# Altium PCB main.PcbDoc
Units mil, origin at the board's own origin, x right, y up, seen from the top; angles counter-clockwise.
Board outline 1775 x 1364.94 mil, 2 copper layers (Top Layer, Bottom Layer); 17 components, 12 nets, 57 pads, 0 vias.
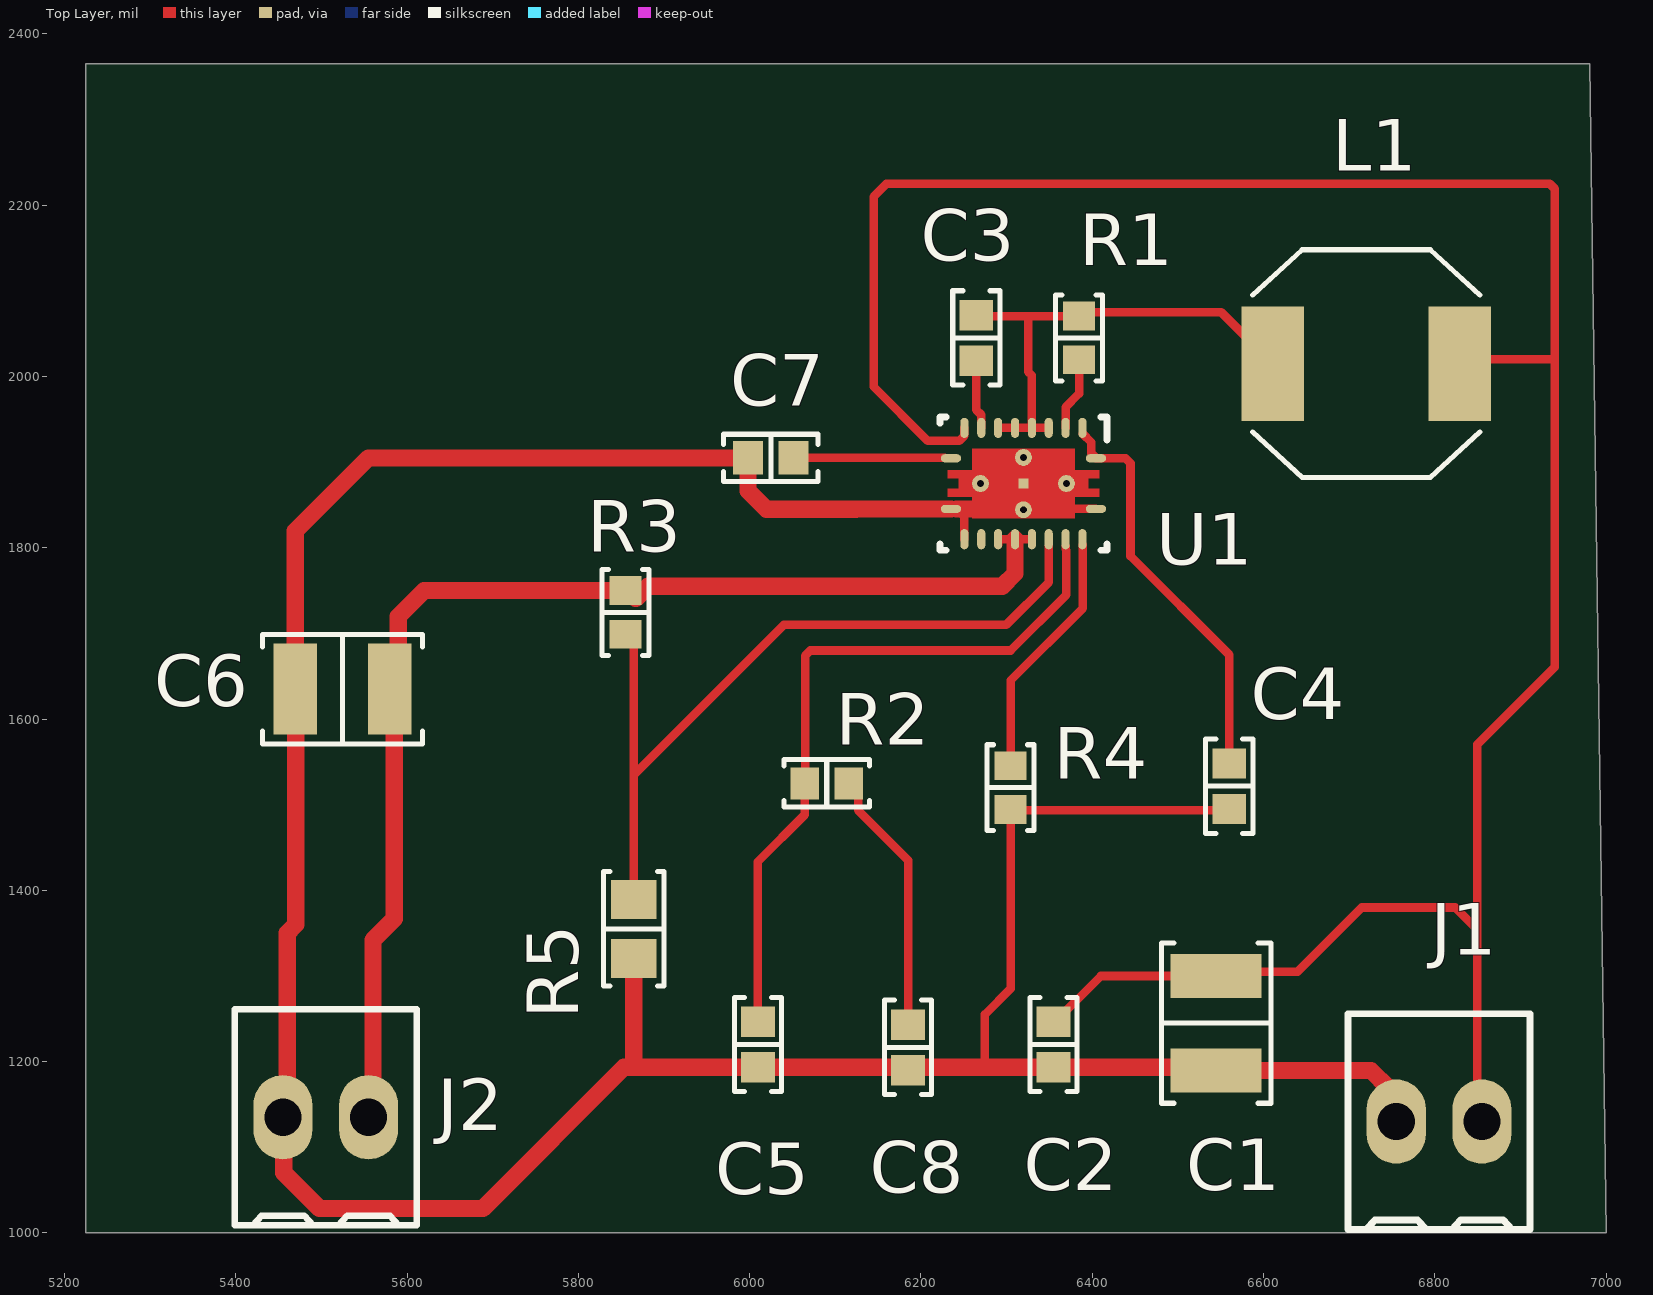
[diagram p0: Top Layer view]
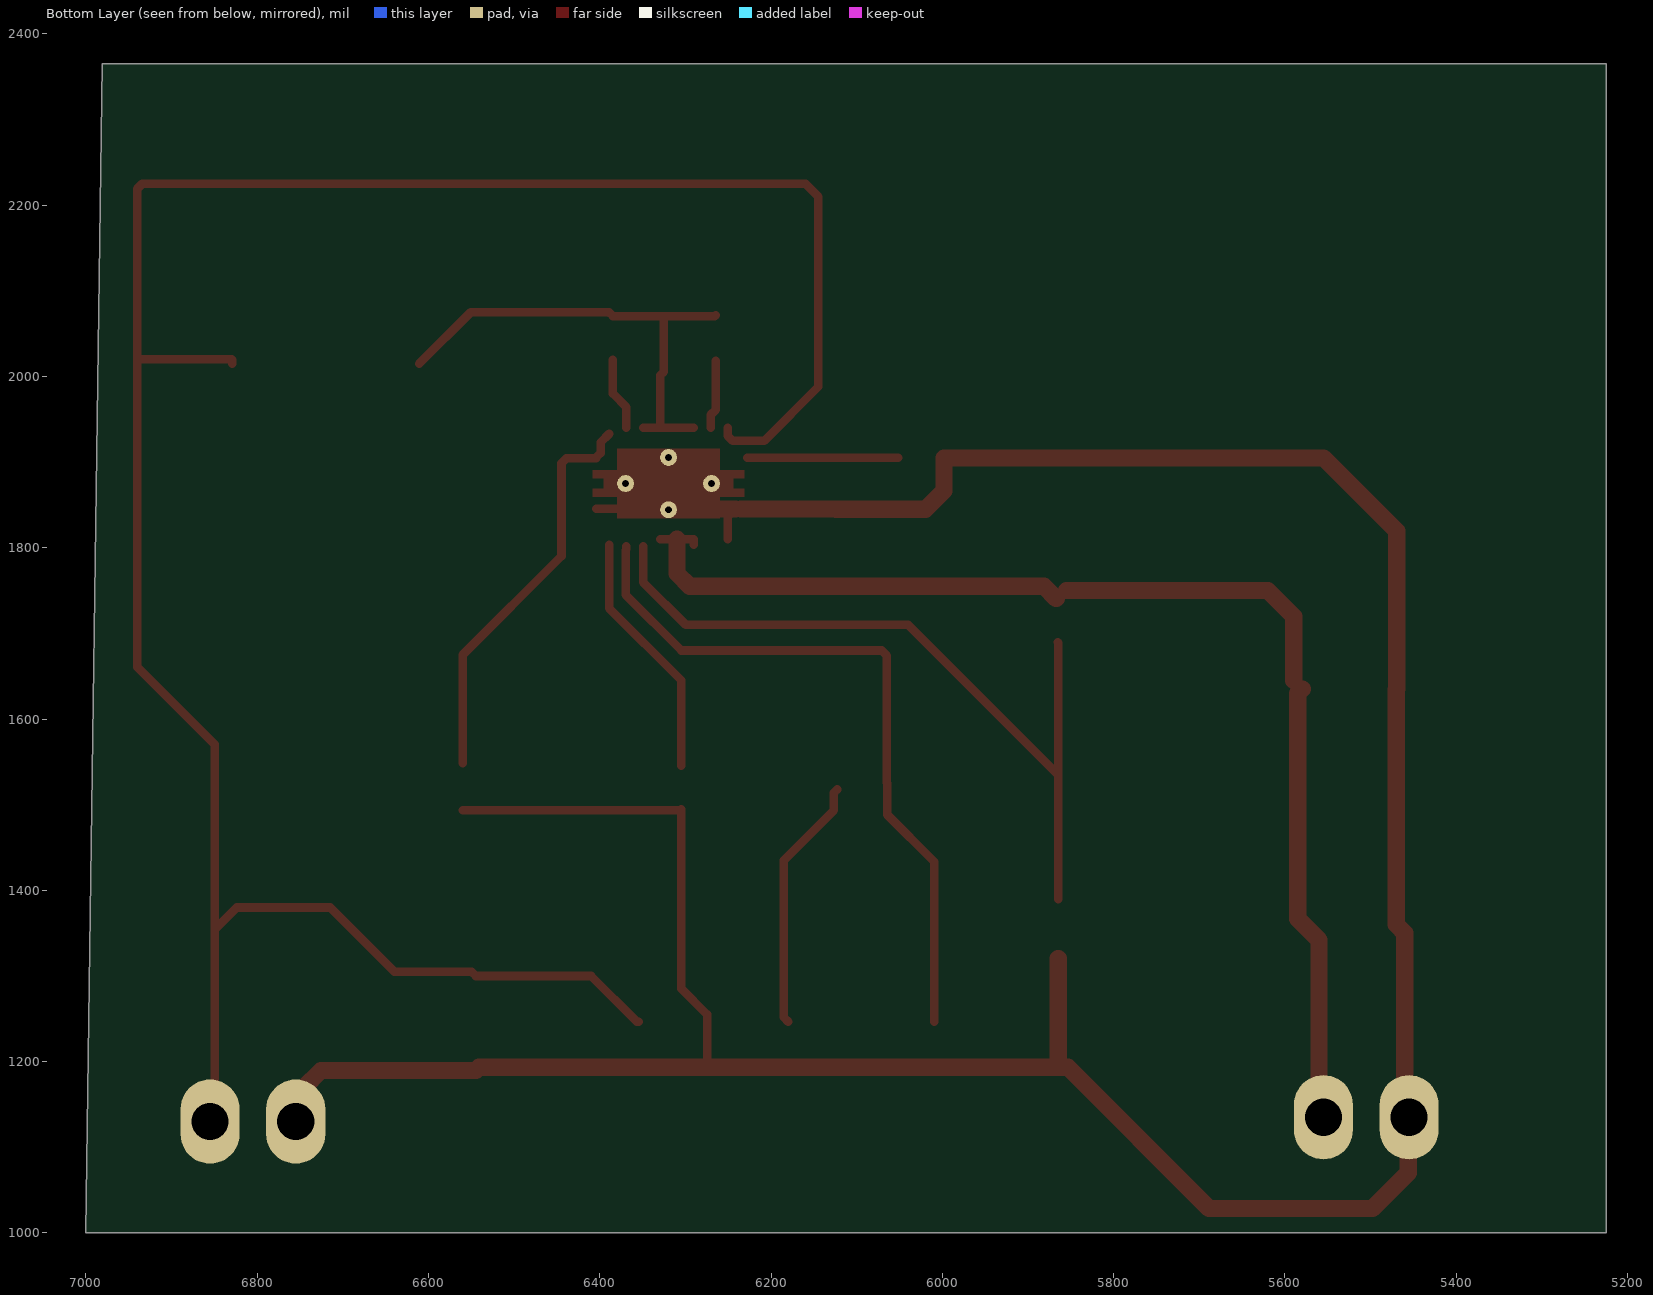
[diagram p1: Bottom Layer view, seen from below]
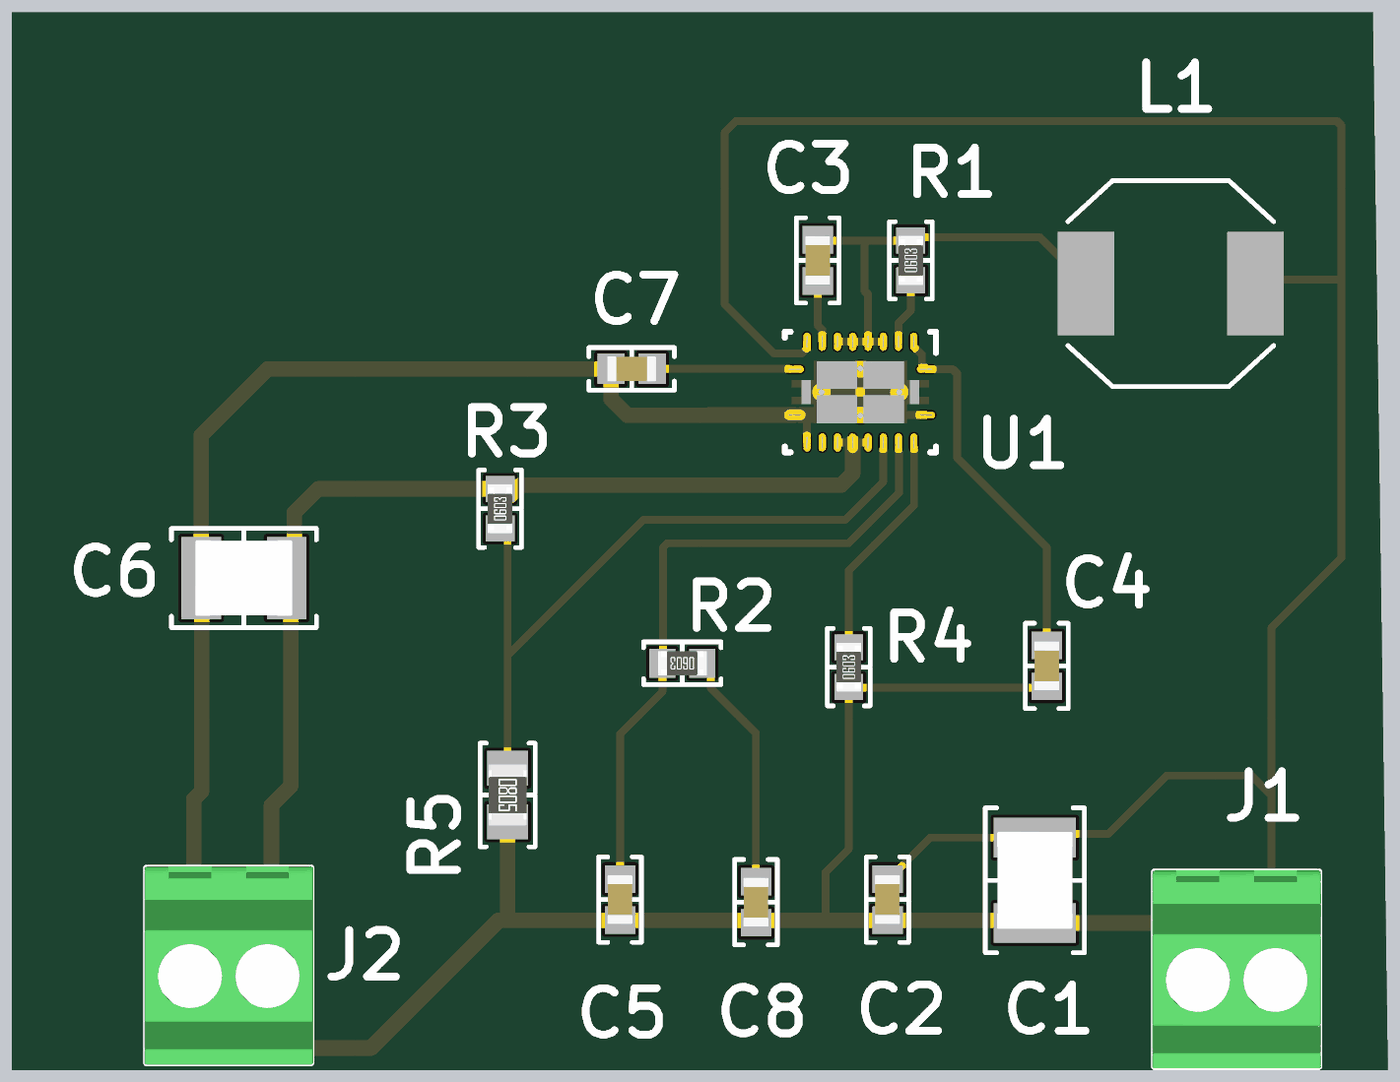
[diagram p2: 3D render of the assembled board from above, using the file's embedded part models]

## Layer stack, top to bottom
Top Solder: solder mask 0.4, Solder Resist, Dk 3.5
Top Layer: signal copper 1.4
Dielectric 1: dielectric 12.6, FR-4, Dk 4.8
Bottom Layer: signal copper 1.4
Bottom Solder: solder mask 0.4, Solder Resist, Dk 3.5

## Board outline
5225,1000 7000,1000 6980.68,2364.94 5225,2364.94

## Design rules (kind name [scope] priority, off if disabled: settings)
Clearance [All] p1: gap=7 ignorepadtopadclearanceinfootprint=TRUE except(0: Arc-Hole Track-Hole SMDPad-Hole THPad-Hole Via-Hole Fill-Hole Poly-Hole Region-Hole Text-Hole)
PolygonConnect [All] p1: connectstyle=Relief reliefconductorwidth=10 reliefentries=4 polygonreliefangle="90 Angle" airgapwidth=10
RoutingVias [All] p1: holewidth=28 width=50 viastyle="Through Hole" minholewidth=28 minwidth=50 maxholewidth=28 maxwidth=50
SolderMaskExpansion [All] p1: expansion=4 istentingtop=FALSE
Width [All] p1: maxlimit=20 minlimit=10 preferedwidth=10 minimp=50.000000 maximp=50.000000 favimp=50.000000
30 further rules are at their usual default settings.

## Components (designator, comment, footprint, x,y, rotation, side; value= is the part's Value field where it differs from the comment)
C1 "10µF" "CAP 1210_3225 - 2.8MM" 6544.69,1244.85 r270 top
C2 "100nF" "CAP 0603_1608" 6354.69,1219.96 r270 top
C3 "0.1µF" "CAP 0603_1608" 6264.69,2044.96 r90 top
C4 "1µF" "CAP 0603_1608" 6560,1521.57 r90 top
C5 "22pF" "CAP 0603_1608" 6009.69,1219.96 r90 top
C6 "22µF" "CAP 1210_3225 - 2.8MM" 5524.57,1634.96 r0 top
C7 "8.2nF" "CAP 0603_1608" 6024.69,1904.96 r0 top
C8 "Ccomp=Value" "CAP 0603_1608" 6185,1216.57 r90 top value=470pF
J1 "282834-2" "TE 282834-2" 6805,1130 r180 top
J2 "282834-2" "TE 282834-2" 5505,1135 r180 top
L1 "SPM6530T-2R2M" IND_SPM6530_TDK 6720,2015 r0 top
R1 "267 kOhms" "RES 0603_1608" 6384.69,2044.96 r90 top
R2 "36.5 kOhms" "RES 0603_1608" 6090,1525 r180 top
R3 "865 kOhms" "RES 0603_1608" 5855,1724.41 r90 top
R4 "105 kOhms" "RES 0603_1608" 6304.69,1519.96 r90 top
R5 "92 kOhms" "RES 0805_2012" 5864.69,1354.96 r270 top
U1 "TPS61088RHLR" RHL0020A 6319.69,1874.97 r270 top value=Value

## Footprints (in the part's own frame and the unit in brackets; to place one, negate y for a bottom-side part, rotate by r counter-clockwise, add the part's x,y. Pads: shape width x height; smd on the part's side, far side on the other; paste and mask are expansions set on the pad)
"CAP 0603_1608" [mm] "Chip Capacitor, 2-Leads, Body 1.60x0.80mm, IPC Medium Density"
  rect 0.9x1 smd: 1(-0.675,0) 2(0.675,0)
  silkscreen extent -1.4,-0.7 1.4,0.7, body extent -0.8,-0.41 0.8,0.41, height 0.82
"CAP 1210_3225 - 2.8MM" [mm] "Chip Capacitor, 2-Leads, Body 3.20x2.50mm, IPC Medium Density"
  rect 1.3x2.7 smd: 1(-1.4,0) 2(1.4,0)
  silkscreen extent -2.37,-1.63 2.37,1.63, body extent -1.6,-1.25 1.6,1.25, height 2.8
IND_SPM6530_TDK [mm]
  rect 1.85x3.4 smd paste+0 mask+0: 1(-2.775,0) 2(2.775,0)
  silkscreen extent -3.37,-3.38 3.37,3.38, body extent 0,0 0.25,0.25, height 0.25
"RES 0603_1608" [mm] "Chip Resistor, 2-Leads, Body 1.60x0.80mm, IPC Medium Density"
  rect 0.85x0.95 smd: 1(-0.65,0) 2(0.65,0)
  silkscreen extent -1.27,-0.7 1.27,0.7, body extent -0.8,-0.4 0.8,0.4, height 0.45
"RES 0805_2012" [mm] "Chip Resistor, 2-Leads, Body 2.00x1.25mm, IPC Medium Density"
  rect 1.15x1.35 smd: 1(-0.875,0) 2(0.875,0)
  silkscreen extent -1.7,-0.9 1.7,0.9, body extent -1,-0.62 1,0.63, height 0.6
RHL0020A [mm]
  oval 0.24x0.6 smd paste-0.102 mask+0.051: 1(-0.75,2.15) 10(-0.75,-2.15) 11(0.75,-2.15) 20(0.75,2.15)
  oval 0.6x0.24 smd paste-0.102 mask+0.051: 2(-1.65,1.75) 3(-1.65,1.25) 4(-1.65,0.75) 5(-1.65,0.25) 6(-1.65,-0.25) 7(-1.65,-0.75) 8(-1.65,-1.25) 9(-1.65,-1.75) 12(1.65,-1.75) 13(1.65,-1.25) 14(1.65,-0.75) 15(1.65,-0.25) 16(1.65,0.25) 17(1.65,0.75) 18(1.65,1.25) 19(1.65,1.75)
  rect 0.3x0.3 smd paste-0.137 mask+0: 21(0,0)
  round 0.5 hole 0.203 mask+0.051: V(-0.775,0) V(0,1.275) V(0,-1.275) V(0.775,0)
  Top Layer region: 0.39,2.25 0.16,2.25 0.16,1.925 -0.16,1.925 -0.16,2.25 -0.39,2.25 -0.39,1.525 -1.025,1.525 -1.025,-1.525 -0.39,-1.525 -0.39,-2.25 -0.16,-2.25 -0.16,-1.925 0.16,-1.925 0.16,-2.25 0.39,-2.25 0.39,-1.525 1.025,-1.525 1.025,1.525 0.39,1.525
  silkscreen extent -1.98,-2.47 1.98,2.47, body extent 0,0 0.25,0.25, height 0.25
"TE 282834-2" [mm]
  oval 1.75x2.5 hole 1.1: 1(-1.27,0) 2(1.27,0)
  silkscreen extent -2.7,-3.2 2.7,3.2, body extent -2.77,-3.25 2.77,3.25, height 10

## Part data
C1: library part GCJ32EC71H106KA01L, "CAP CER 10UF 50V X7S 1210", Device Package="1210 (3225 Metric)", Manufacturer="Murata Electronics", Operating Temperature="-55°C ~ 125°C", Ratings=AEC-Q200, Supplier Part Number 1=490-14418-1-ND, Temperature Coefficient=X7S, Tolerance=±10%, Voltage - Rated=50V, Applications="Automotive, Boardflex Sensitive", Capacitance=10µF, ComponentLink1Description=Datasheet, ComponentLink1URL=https://search.murata.co.jp/Ceramy/image/img/A01X/G101/ENG/GCJ32EC71H106KA01-01.pdf, ComponentLink2Description="DigiKey Link", ComponentLink2URL=http://digikey.com/product-detail/en/murata-electronics/GCJ32EC71H106KA01L/490-14418-1-ND/6606879, Features="Soft Termination", LastUpdated="02.09.2020 1:10:53", Lifecycle Status=Active, Minimum Order=1, Mounting Type="Surface Mount, MLCC", Package / Case="1210 (3225 Metric)", Packaging=TapeAndReel, Part Number=GCJ32EC71H106KA01L, Part Status=Active, PartId=23622, Price=0.53, Series=GCJ, Size / Dimension="0.126\" L x 0.098\" W (3.20mm x 2.50mm)", Supplier 1=DigiKey, Thickness (Max)="0.110\" (2.80mm)"
C2: library part 06033A220KAT2A, "CAP CER 22PF 25V C0G/NP0 0603", Capacitance=22pF, Device Package="0603 (1608 Metric)", Manufacturer="AVX Corporation", Operating Temperature="-55°C ~ 125°C", Supplier Part Number 1=478-11803-1-ND, Temperature Coefficient="C0G, NP0", Tolerance=±10%, Voltage - Rated=25V, Applications="General Purpose", ComponentLink1Description=Datasheet, ComponentLink1URL=http://datasheets.avx.com/C0GNP0-Dielectric.pdf, ComponentLink2Description="DigiKey Link", ComponentLink2URL=http://digikey.com/product-detail/en/avx-corporation/06033A220KAT2A/478-11803-1-ND/8573439, LastUpdated="02.09.2020 1:03:34", Lifecycle Status=Active, Minimum Order=1, Mounting Type="Surface Mount, MLCC", Package / Case="0603 (1608 Metric)", Packaging=TapeAndReel, Part Number=06033A220KAT2A, Part Status=Active, PartId=3017, Price=0.04, Series=-, Size / Dimension="0.063\" L x 0.032\" W (1.60mm x 0.81mm)", Supplier 1=DigiKey, Thickness (Max)="0.035\" (0.90mm)"
C3: library part 0603YC104JAT4A, "CAP CER 0.1UF 16V X7R 0603", Device Package="0603 (1608 Metric)", Manufacturer="AVX Corporation", Operating Temperature="-55°C ~ 125°C", Supplier Part Number 1=478-7621-1-ND, Temperature Coefficient=X7R, Tolerance=±5%, Voltage - Rated=16V, Applications="General Purpose", Capacitance=0.1µF, ComponentLink1Description=Datasheet, ComponentLink1URL=http://datasheets.avx.com/X7RDielectric.pdf, ComponentLink2Description="DigiKey Link", ComponentLink2URL=http://digikey.com/product-detail/en/avx-corporation/0603YC104JAT4A/478-7621-1-ND/7536239, LastUpdated="02.09.2020 1:03:19", Lifecycle Status=Active, Minimum Order=1, Mounting Type="Surface Mount, MLCC", Package / Case="0603 (1608 Metric)", Packaging=TapeAndReel, Part Number=0603YC104JAT4A, Part Status=Active, PartId=11638, Price=0.03, Series=-, Size / Dimension="0.063\" L x 0.032\" W (1.60mm x 0.81mm)", Supplier 1=DigiKey, Thickness (Max)="0.035\" (0.90mm)"
C4: library part C0603C105K4PACTU, "CAP CER 1UF 16V X5R 0603", Device Package="0603 (1608 Metric)", Manufacturer=KEMET, Operating Temperature="-55°C ~ 85°C", Supplier Part Number 1=399-5090-1-ND, Temperature Coefficient=X5R, Tolerance=±10%, Voltage - Rated=16V, Applications="General Purpose", Capacitance=1µF, ComponentLink1Description=Datasheet, ComponentLink1URL=https://api.kemet.com/component-edge/download/datasheet/C0603C105K4PACTU.pdf, ComponentLink2Description="DigiKey Link", ComponentLink2URL=http://digikey.com/product-detail/en/kemet/C0603C105K4PACTU/399-5090-1-ND/1465624, LastUpdated="02.09.2020 1:03:33", Lifecycle Status=Active, Minimum Order=1, Mounting Type="Surface Mount, MLCC", Package / Case="0603 (1608 Metric)", Packaging=TapeAndReel, Part Number=C0603C105K4PACTU, Part Status=Active, PartId=3768, Price=0.02, Series="SMD Comm X5R", Size / Dimension="0.063\" L x 0.031\" W (1.60mm x 0.80mm)", Supplier 1=DigiKey, Thickness (Max)="0.035\" (0.90mm)"
C5: library part 06033A220KAT2A, "CAP CER 22PF 25V C0G/NP0 0603", Device Package="0603 (1608 Metric)", Manufacturer="AVX Corporation", Operating Temperature="-55°C ~ 125°C", Supplier Part Number 1=478-11803-1-ND, Temperature Coefficient="C0G, NP0", Tolerance=±10%, Voltage - Rated=25V, Applications="General Purpose", Capacitance=22pF, ComponentLink1Description=Datasheet, ComponentLink1URL=http://datasheets.avx.com/C0GNP0-Dielectric.pdf, ComponentLink2Description="DigiKey Link", ComponentLink2URL=http://digikey.com/product-detail/en/avx-corporation/06033A220KAT2A/478-11803-1-ND/8573439, LastUpdated="02.09.2020 1:03:34", Lifecycle Status=Active, Minimum Order=1, Mounting Type="Surface Mount, MLCC", Package / Case="0603 (1608 Metric)", Packaging=TapeAndReel, Part Number=06033A220KAT2A, Part Status=Active, PartId=3017, Price=0.04, Series=-, Size / Dimension="0.063\" L x 0.032\" W (1.60mm x 0.81mm)", Supplier 1=DigiKey, Thickness (Max)="0.035\" (0.90mm)"
C6: library part GRM32ER71E226ME15K, "CAP CER 22UF 25V X7R 1210", Device Package="1210 (3225 Metric)", Manufacturer="Murata Electronics", Operating Temperature="-55°C ~ 125°C", Supplier Part Number 1=490-14682-1-ND, Temperature Coefficient=X7R, Tolerance=±20%, Voltage - Rated=25V, Applications="General Purpose", Capacitance=22µF, ComponentLink1Description=Datasheet, ComponentLink1URL=https://search.murata.co.jp/Ceramy/image/img/A01X/G101/ENG/GRM32ER71E226ME15-01.pdf, ComponentLink2Description="DigiKey Link", ComponentLink2URL=http://digikey.com/product-detail/en/murata-electronics/GRM32ER71E226ME15K/490-14682-1-ND/6606288, LastUpdated="02.09.2020 1:10:50", Lifecycle Status=Active, Minimum Order=1, Mounting Type="Surface Mount, MLCC", Package / Case="1210 (3225 Metric)", Packaging=TapeAndReel, Part Number=GRM32ER71E226ME15K, Part Status=Active, PartId=24019, Price=0.35, Series=GRM, Size / Dimension="0.126\" L x 0.098\" W (3.20mm x 2.50mm)", Supplier 1=DigiKey, Thickness (Max)="0.106\" (2.70mm)"
C7: library part C0603C105K4PACTU, "CAP CER 1UF 16V X5R 0603", Capacitance=1µF, Device Package="0603 (1608 Metric)", Manufacturer=KEMET, Operating Temperature="-55°C ~ 85°C", Supplier Part Number 1=399-5090-1-ND, Temperature Coefficient=X5R, Tolerance=±10%, Voltage - Rated=16V, Applications="General Purpose", ComponentLink1Description=Datasheet, ComponentLink1URL=https://api.kemet.com/component-edge/download/datasheet/C0603C105K4PACTU.pdf, ComponentLink2Description="DigiKey Link", ComponentLink2URL=http://digikey.com/product-detail/en/kemet/C0603C105K4PACTU/399-5090-1-ND/1465624, LastUpdated="02.09.2020 1:03:33", Lifecycle Status=Active, Minimum Order=1, Mounting Type="Surface Mount, MLCC", Package / Case="0603 (1608 Metric)", Packaging=TapeAndReel, Part Number=C0603C105K4PACTU, Part Status=Active, PartId=3768, Price=0.02, Series="SMD Comm X5R", Size / Dimension="0.063\" L x 0.031\" W (1.60mm x 0.80mm)", Supplier 1=DigiKey, Thickness (Max)="0.035\" (0.90mm)"
C8: library part 885012006027, "CAP CER 470PF 16V C0G/NP0 0603", Capacitance=470pF, Device Package="0603 (1608 Metric)", Manufacturer="Würth Elektronik", Operating Temperature="-55°C ~ 125°C", Supplier Part Number 1=732-7770-1-ND, Temperature Coefficient="C0G, NP0", Tolerance=±5%, Voltage - Rated=16V, Applications="General Purpose", ComponentLink1Description=Datasheet, ComponentLink1URL=https://katalog.we-online.de/pbs/datasheet/885012006027.pdf, ComponentLink2Description="DigiKey Link", ComponentLink2URL=http://digikey.com/product-detail/en/w-rth-elektronik/885012006027/732-7770-1-ND/5454397, LastUpdated="02.09.2020 1:03:24", Lifecycle Status=Active, Minimum Order=1, Mounting Type="Surface Mount, MLCC", Package / Case="0603 (1608 Metric)", Packaging=TapeAndReel, Part Number=885012006027, Part Status=Active, PartId=8947, Price=0.05, Series=WCAP-CSGP, Size / Dimension="0.063\" L x 0.031\" W (1.60mm x 0.80mm)", Supplier 1=DigiKey, Thickness (Max)="0.034\" (0.87mm)"
J1 J2: "TERM BLK 2P SIDE ENT 2.54MM PCB", Color=Green, Current=10A, Manufacturer="TE Connectivity AMP Connectors", Supplier Part Number 1=A98333-ND, Voltage=150V, ComponentLink1Description=Datasheet, ComponentLink1URL=https://www.te.com/commerce/DocumentDelivery/DDEController?Action=srchrtrv&DocNm=282834&DocType=Customer+Drawing&DocLang=English, ComponentLink2Description="DigiKey Link", ComponentLink2URL=http://digikey.com/product-detail/en/te-connectivity-amp-connectors/282834-2/A98333-ND/1150135, LastUpdated="15.01.2020 4:15:38", Lifecycle Status=Active, Mating Orientation="Horizontal with Board", Minimum Order=1, Mounting Type="Through Hole", Number of Levels=1, Packaging=Bulk, Part Number=282834-2, Part Status=Active, Pitch="0.100\" (2.54mm)", Positions Per Level=2, Price=0.88, Series=Buchanan, Supplier 1=DigiKey, Wire Gauge="16-30 AWG", Wire Termination="Screw - Rising Cage Clamp"
L1: "No Description Available", Built_By=EMA_UL_Team, Copyright="Copyright (C) 2018 Accelerated Designs. All rights reserved", Manufacturer_Part_Number=SPM6530T-2R2M, SourceLibrary=TDK_2015_05_22, Vendor=TDK
R1: library part RC0603FR-07267KL, "RES SMD 267K OHM 1% 1/10W 0603", Device Package="0603 (1608 Metric)", Manufacturer=Yageo, Operating Temperature="-55°C ~ 155°C", Power (Watts)="0.1W, 1/10W", Supplier Device Package=0603, Supplier Part Number 1=311-267KHRCT-ND, Temperature Coefficient=±100ppm/°C, Tolerance=±1%, ComponentLink1Description=Datasheet, ComponentLink1URL=https://www.yageo.com/upload/media/product/productsearch/datasheet/rchip/PYu-RC_Group_51_RoHS_L_10.pdf, ComponentLink2Description="DigiKey Link", ComponentLink2URL=http://digikey.com/product-detail/en/yageo/RC0603FR-07267KL/311-267KHRCT-ND/730045, Composition="Thick Film", Features="Moisture Resistant", Height - Seated (Max)="0.022\" (0.55mm)", LastUpdated="02.09.2020 1:10:19", Lifecycle Status=Active, Minimum Order=1, Number of Terminations=2, Package / Case="0603 (1608 Metric)", Packaging=CutTape, Part Number=RC0603FR-07267KL, Part Status=Active, PartId=7613, Price=0.10, Resistance="267 kOhms", Series=RC, Size / Dimension="0.063\" L x 0.031\" W (1.60mm x 0.80mm)", Supplier 1=DigiKey
R2: library part CR0603-FX-3652ELF, "RES SMD 36.5K OHM 1% 1/10W 0603", Device Package="0603 (1608 Metric)", Manufacturer="Bourns Inc.", Operating Temperature="-55°C ~ 155°C", Power (Watts)="0.1W, 1/10W", Supplier Device Package=0603, Supplier Part Number 1=CR0603-FX-3652ELFCT-ND, Temperature Coefficient=±100ppm/°C, Tolerance=±1%, ComponentLink1Description=Datasheet, ComponentLink1URL=https://www.bourns.com/docs/Product-Datasheets/CHPREZTR.pdf, ComponentLink2Description="DigiKey Link", ComponentLink2URL=http://digikey.com/product-detail/en/bourns-inc/CR0603-FX-3652ELF/CR0603-FX-3652ELFCT-ND/4247786, Composition="Thick Film", Features="Moisture Resistant", Height - Seated (Max)="0.022\" (0.55mm)", LastUpdated="02.09.2020 1:10:18", Lifecycle Status=Active, Minimum Order=1, Number of Terminations=2, Package / Case="0603 (1608 Metric)", Packaging=TapeAndReel, Part Number=CR0603-FX-3652ELF, Part Status=Active, PartId=8146, Price=0.01, Resistance="36.5 kOhms", Series=CR0603, Size / Dimension="0.063\" L x 0.031\" W (1.60mm x 0.80mm)", Supplier 1=DigiKey
R3: library part RC0603FR-07267KL, "RES SMD 267K OHM 1% 1/10W 0603", Device Package="0603 (1608 Metric)", Manufacturer=Yageo, Operating Temperature="-55°C ~ 155°C", Power (Watts)="0.1W, 1/10W", Resistance="267 kOhms", Supplier Device Package=0603, Supplier Part Number 1=311-267KHRCT-ND, Temperature Coefficient=±100ppm/°C, Tolerance=±1%, ComponentLink1Description=Datasheet, ComponentLink1URL=https://www.yageo.com/upload/media/product/productsearch/datasheet/rchip/PYu-RC_Group_51_RoHS_L_10.pdf, ComponentLink2Description="DigiKey Link", ComponentLink2URL=http://digikey.com/product-detail/en/yageo/RC0603FR-07267KL/311-267KHRCT-ND/730045, Composition="Thick Film", Features="Moisture Resistant", Height - Seated (Max)="0.022\" (0.55mm)", LastUpdated="02.09.2020 1:10:19", Lifecycle Status=Active, Minimum Order=1, Number of Terminations=2, Package / Case="0603 (1608 Metric)", Packaging=CutTape, Part Number=RC0603FR-07267KL, Part Status=Active, PartId=7613, Price=0.10, Series=RC, Size / Dimension="0.063\" L x 0.031\" W (1.60mm x 0.80mm)", Supplier 1=DigiKey
R4: library part RC0603FR-07105KL, "RES SMD 105K OHM 1% 1/10W 0603", Device Package="0603 (1608 Metric)", Manufacturer=Yageo, Operating Temperature="-55°C ~ 155°C", Power (Watts)="0.1W, 1/10W", Supplier Device Package=0603, Supplier Part Number 1=311-105KHRCT-ND, Temperature Coefficient=±100ppm/°C, Tolerance=±1%, ComponentLink1Description=Datasheet, ComponentLink1URL=https://www.yageo.com/upload/media/product/productsearch/datasheet/rchip/PYu-RC_Group_51_RoHS_L_10.pdf, ComponentLink2Description="DigiKey Link", ComponentLink2URL=http://digikey.com/product-detail/en/yageo/RC0603FR-07105KL/311-105KHRCT-ND/729840, Composition="Thick Film", Features="Moisture Resistant", Height - Seated (Max)="0.022\" (0.55mm)", LastUpdated="02.09.2020 1:10:19", Lifecycle Status=Active, Minimum Order=1, Number of Terminations=2, Package / Case="0603 (1608 Metric)", Packaging=CutTape, Part Number=RC0603FR-07105KL, Part Status=Active, PartId=7511, Price=0.10, Resistance="105 kOhms", Series=RC, Size / Dimension="0.063\" L x 0.031\" W (1.60mm x 0.80mm)", Supplier 1=DigiKey
R5: library part RN73C2A392KBTDF, "RES SMD 392K OHM 0.1% 1/10W 0805", Device Package="0805 (2012 Metric)", Manufacturer="TE Connectivity Passive Product", Operating Temperature="-55°C ~ 155°C", Power (Watts)="0.1W, 1/10W", Resistance="392 kOhms", Supplier Device Package=0805, Supplier Part Number 1=A103425CT-ND, Temperature Coefficient=±10ppm/°C, Tolerance=±0.1%, ComponentLink1Description=Datasheet, ComponentLink1URL=https://www.te.com/commerce/DocumentDelivery/DDEController?Action=srchrtrv&DocNm=1773270&DocType=DS&DocLang=English, ComponentLink2Description="DigiKey Link", ComponentLink2URL=http://digikey.com/product-detail/en/te-connectivity-passive-product/RN73C2A392KBTDF/A103425CT-ND/2730640, Composition="Thin Film", Height - Seated (Max)="0.026\" (0.65mm)", LastUpdated="02.09.2020 1:14:40", Lifecycle Status=Active, Minimum Order=1, Number of Terminations=2, Package / Case="0805 (2012 Metric)", Packaging=TapeAndReel, Part Number=RN73C2A392KBTDF, Part Status=Active, PartId=46853, Price=0.37, Series="RN73, Holsworthy", Size / Dimension="0.079\" L x 0.049\" W (2.00mm x 1.25mm)", Supplier 1=DigiKey
U1: "No Description Available", Alternate_PartNumber=TPS61088RHLT, Manufacturer="Texas Instruments", CompType=IC, Copyright="Copyright (C) 2018 Accelerated Designs. All rights reserved", MountType=SMT, PackageReference=RHL0020A, PartNumber=TPS61088RHLR, PIN_COUNT=21, RefDes=RefDes, RoHS=Y, Type=DEV

## Nets (pads, with @x,y where several pads share a name; then routed paths per layer and width w, separated by ;. In a path a pad name is that pad's centre, name@x,y a point inside that pad or via, vN(x,y) a via of type N, cw(c..) or ccw(c..) an arc to the next point about the centre after c; other vN are vias at no path point)
+7.4V: C1.1 C2.1 J1.1 L1.2 U1.9 | length 2972.3
  Top Layer w10: U1.9 6250.79,1930.86 6244.93,1925 6207.82,1925 6144.69,1988.14 6144.69,2209.96 6159.69,2224.96 6934.14,2224.96 6940,2219.11 6940,2020 ; C2.1 6356.65,1246.54 6410.08,1299.96 C1.1 6549.69,1304.96 6639.69,1304.96 6714.69,1379.96 6823.83,1379.96 6849.69,1354.11 ; L1.2 6829.25,2019.25 6830,2020 6940,2020 ; J1.1@6849.69,1130 6849.69,1354.11 ; 6849.69,1354.11 6849.69,1570.36 6940,1660.67 6940,2020
+12v: C6.2 J2.1 R3.2 U1.14 U1.15 U1.16 | length 1430
  Top Layer w10: C6.2 C6.2@5589.72,1645 ; U1.14@6290.16,1803.47 U1.14 ; U1.14@6290.43,1810.01 U1.15 U1.16
  Top Layer w20: J2.1@5560,1125 5560,1228 5560,1341.75 5585,1366.75 5585,1629.65 C6.2 ; C6.2@5589.72,1645 5589.72,1719.72 5620,1750 R3.2 ; R3.2@5866.97,1740.59 5881.38,1755 6295,1755 6309.84,1769.84 U1.15
GND: C1.2 C2.2 C4.1 C5.1 C6.1 C7.1 C8.1 J1.2 J2.2 R4.1 R5.2 U1.11 U1.12 U1.20 U1.21 | length 3908.5
  Top Layer w10: 6123.86,1844.96 6124.33,1845.44 ; U1.11 6241.58,1845.44 6250.79,1836.23 U1.12 ; 6274.69,1193.39 6274.69,1254.96 6304.69,1284.96 R4.1 6305.67,1493.39 C4.1@6560,1493.39 ; 6278.74,1845.44 6279.21,1844.96 6279.69,1844.96 ; U1.21 6320.59,1874.06 6339.9,1874.06 6368.53,1845.44 U1.20 ; C1.2@6541.02,1193.39 C1.2
  Top Layer w20: J2.2 5456.06,1133.94 5456.06,1070.15 5497.92,1028.28 5688.28,1028.28 5853.39,1193.39 5864.69,1193.39 ; J2.2@5460,1135 5460,1200 5460,1350 5470,1360 5470,1634.41 C6.1 5469.45,1819.45 5554.96,1904.96 C7.1 5998.11,1866.54 6019.69,1844.96 6123.86,1844.96 ; R5.2 5864.69,1193.39 ; 6124.33,1845.44 U1.11 ; U1.11@6241.58,1845.44 6250.79,1845.44 6278.74,1845.44 ; C1.2@6541.02,1193.39 C2.2 6274.69,1193.39 6185,1193.39 C5.1 5864.69,1193.39 ; C1.2 6725.39,1189.73 6745.64,1169.47 6745.64,1139.36 J1.2
NetC3_1: C3.1 U1.8 | length 80.9
  Top Layer w10: C3.1 6264.69,1961.01 6270.47,1955.22 U1.8
NetC3_2: C3.2 L1.1 R1.2 U1.4 U1.5 U1.6 U1.7 | length 564.4
  Top Layer w10: C3.2 6265.67,2070.55 6325.18,2070.55 ; U1.7@6290.43,1939.93 U1.6 U1.5 ; U1.4 U1.5 ; L1.1 6550.75,2075 6389.13,2075 R1.2 6325.18,2070.55 ; 6325.18,2070.55 6325.18,2005.46 6329.53,2001.11 U1.5
NetC4_2: C4.2 U1.1 U1.2 | length 475.2
  Top Layer w10: U1.2@6388.86,1933.12 6399.1,1922.87 6399.1,1910.55 U1.1@6404.33,1905.32 ; U1.1 6438.83,1904.49 6444.69,1898.63 6444.69,1790.32 6560,1675 C4.2
NetC5_2: C5.2 R2.2 U1.18 | length 841.6
  Top Layer w10: C5.2 6009.69,1433.59 6064.41,1488.31 R2.2 6065,1525.59 6065,1674.14 6070.86,1680 6304.72,1680 6369.69,1744.96 6369.69,1797.27 6368.9,1798.06 U1.18@6368.9,1801.67
NetC7_2: C7.2 U1.10 | length 176.6
  Top Layer w10: C7.2 U1.10@6227.86,1904.96
NetC8_2: C8.2 R2.1 | length 299
  Top Layer w10: R2.1@6122.84,1517.75 6126.59,1514 6126.59,1493.41 6185,1435 6185,1251.57 C8.2@6180,1246.57
NetR1_1: R1.1 U1.3 | length 86
  Top Layer w10: U1.3 6368.9,1964.18 6384.69,1979.96 R1.1
NetR3_1: R3.1 R5.1 U1.17 | length 919.5
  Top Layer w10: R5.1 5864.69,1535 5864.69,1689.09 R3.1@5865,1689.41 ; 5865,1535 6040,1710 6299.72,1710 6349.21,1759.49 U1.17@6349.21,1801.67
NetR4_2: R4.2 U1.19 | length 292.5
  Top Layer w10: R4.2 6304.69,1644.96 6388.86,1729.14 U1.19@6388.86,1803.2
pads on no net: U1.13 U1.V

## Text inside footprints (layer, text, board x,y; h text height)
L1: Mechanical 13 "*" at 6587.74,1965 h50; Mechanical 7 "0.28in/7.1mm" at 6645,1642.05 h25; Mechanical 7 "0.256in/6.5mm" at 6979.76,2130.45 h25; Mechanical 7 "0.219in/5.55mm" at 6632.5,1742.05 h25; Mechanical 7 "Alt 2 Padstyle: OX90Y60D30P" at 6382.5,1387.05 h50; Mechanical 7 "Alt 1 Padstyle: OX60Y90D30P" at 6382.5,1462.05 h50; Mechanical 7 "Default Padstyle: RX72p83Y133p86D0T" at 6282.5,1537.05 h50